# EAGLE board motor_driver_ver3.0 (EAGLE 6.2)
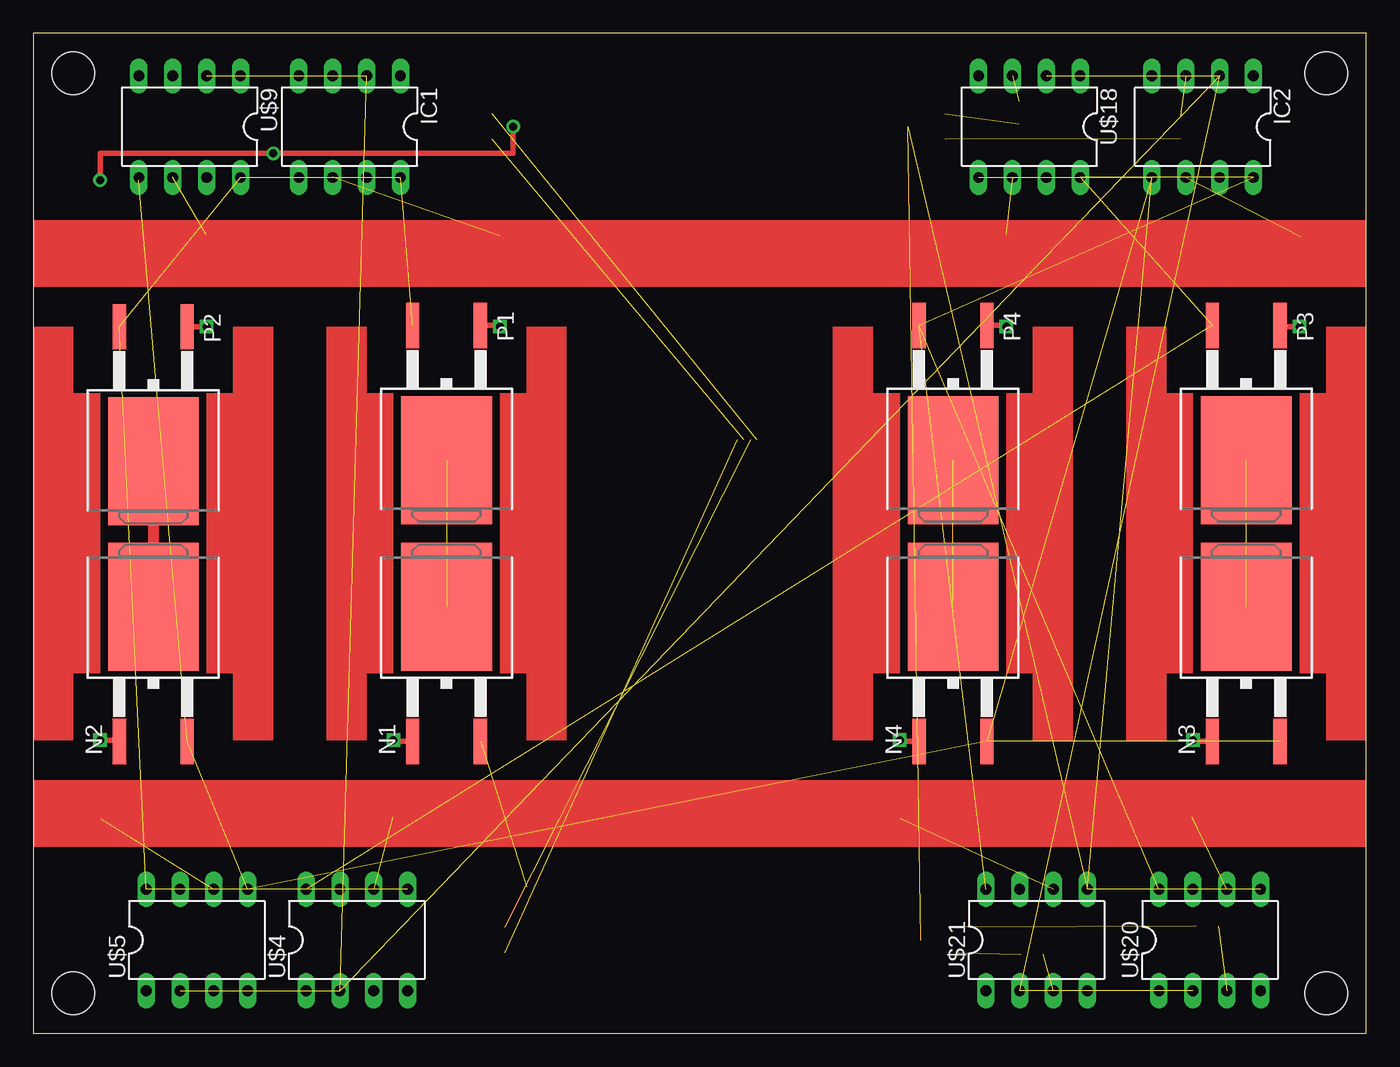
[diagram p0: board, top side]
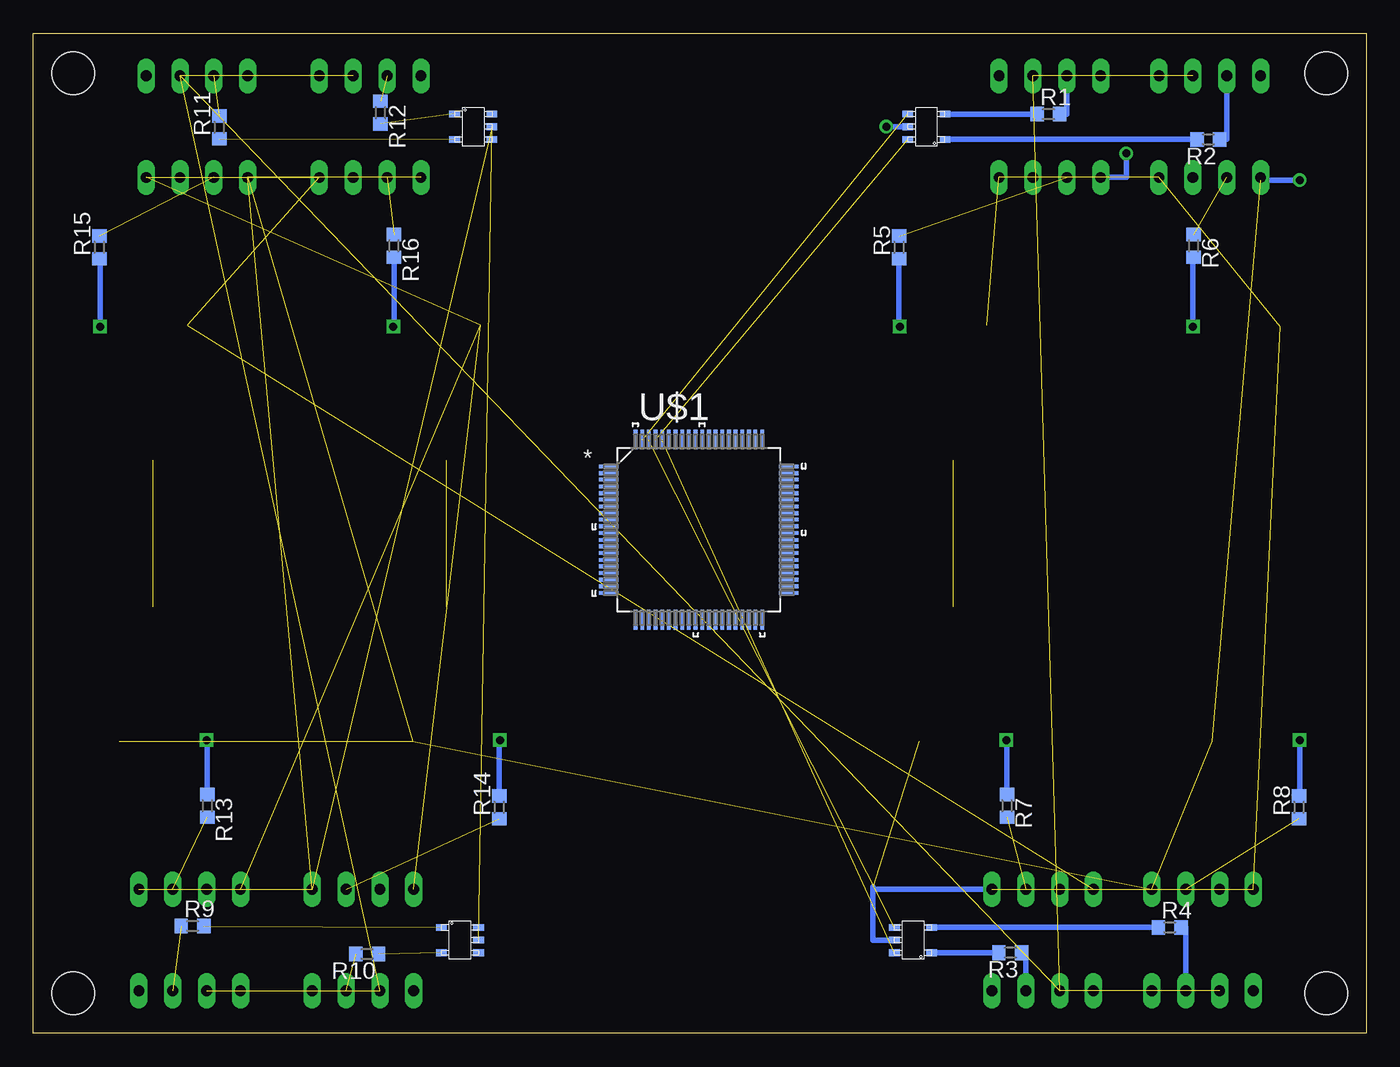
[diagram p1: board, bottom side, seen from below]

Size 100 x 75 mm. Coordinates in mm from the lower left corner, seen from the top.
Outline: 0,0 100,0 100,75 0,75 0,0
Copper layers (1*16): Top 0.035mm / dielectric 1.5mm / Bottom 0.035mm
Design rules: minimum track width 10mil, minimum drill 24mil, track to track 8mil, track to pad 8mil, pad to pad 8mil, via to via 8mil, smd to smd 8mil, copper to edge 40mil, drill to drill 8mil, minimum pad ring 10mil, minimum via ring 8mil, stop-mask expansion 4mil, vias tented up to drill 0mil, thermal gap 10mil
Holes 3.2 mm at 3,3 97,72 3,72 97,3

## Footprints (pad centres in the part's own frame; a part is rotated, then mirrored left to right if it is on the bottom)
DIL08 = drill 0.813 long: 1 -2.54,-3.81; 2 0,-3.81; 3 2.54,-3.81; 4 5.08,-3.81; 5 5.08,3.81; 6 2.54,3.81; 7 0,3.81; 8 -2.54,3.81
TO-263 = smd 1 x 3.4: 1 -2.54,-6.6; 2 2.54,-6.6 | smd 6.8 x 9.6: 3 0,3.5
1608 = smd 1 x 1.1: 1 -0.91,0.05; 2 0.79,0.05
QFP50P1400X1400X120-80N = smd 1.473 x 0.279: 1 -6.756,4.75; 2 -6.756,4.242; 3 -6.756,3.759; 4 -6.756,3.251; 5 -6.756,2.743; 6 -6.756,2.261; 7 -6.756,1.753; 8 -6.756,1.245; 9 -6.756,0.762; 10 -6.756,0.254; 11 -6.756,-0.254; 12 -6.756,-0.762; 13 -6.756,-1.245; 14 -6.756,-1.753; 15 -6.756,-2.261; 16 -6.756,-2.743; 17 -6.756,-3.251; 18 -6.756,-3.759; 19 -6.756,-4.242; 20 -6.756,-4.75; 41 6.756,-4.75; 42 6.756,-4.242; 43 6.756,-3.759; 44 6.756,-3.251; 45 6.756,-2.743; 46 6.756,-2.261; 47 6.756,-1.753; 48 6.756,-1.245; 49 6.756,-0.762; 50 6.756,-0.254; 51 6.756,0.254; 52 6.756,0.762; 53 6.756,1.245; 54 6.756,1.753; 55 6.756,2.261; 56 6.756,2.743; 57 6.756,3.251; 58 6.756,3.759; 59 6.756,4.242; 60 6.756,4.75 | smd 0.279 x 1.473: 21 -4.75,-6.756; 22 -4.242,-6.756; 23 -3.759,-6.756; 24 -3.251,-6.756; 25 -2.743,-6.756; 26 -2.261,-6.756; 27 -1.753,-6.756; 28 -1.245,-6.756; 29 -0.762,-6.756; 30 -0.254,-6.756; 31 0.254,-6.756; 32 0.762,-6.756; 33 1.245,-6.756; 34 1.753,-6.756; 35 2.261,-6.756; 36 2.743,-6.756; 37 3.251,-6.756; 38 3.759,-6.756; 39 4.242,-6.756; 40 4.75,-6.756; 61 4.75,6.756; 62 4.242,6.756; 63 3.759,6.756; 64 3.251,6.756; 65 2.743,6.756; 66 2.261,6.756; 67 1.753,6.756; 68 1.245,6.756; 69 0.762,6.756; 70 0.254,6.756; 71 -0.254,6.756; 72 -0.762,6.756; 73 -1.245,6.756; 74 -1.753,6.756; 75 -2.261,6.756; 76 -2.743,6.756; 77 -3.251,6.756; 78 -3.759,6.756; 79 -4.242,6.756; 80 -4.75,6.756
CHP-5 = smd 0.5 x 0.8: 1 -0.95,-1.4; 2 0.95,-1.4; 3 -0.95,1.4; 4 0,1.4; 5 0.95,1.4

## Placement (x,y rotation side)
IC1  TLP351  [DIL08]  25,68 180 top
IC2  TLP351  [DIL08]  89,68 180 top
N1  FDB8441  [TO-263]  31,28.5 0 top
N2  FDB8441  [TO-263]  9,28.5 0 top
N3  FDB8441  [TO-263]  91,28.5 0 top
N4  FDB8441  [TO-263]  69,28.5 0 top
P1  SUM110P06  [TO-263]  31,46.5 180 top
P2  SUM110P06  [TO-263]  9,46.4 180 top
P3  SUM110P06  [TO-263]  91,46.5 180 top
P4  SUM110P06  [TO-263]  69,46.5 180 top
R1  RESISTOR__SMD  [1608]  23.78,68.89 0 bottom
R2  RESISTOR__SMD  [1608]  11.9,67.1 180 bottom
R3  RESISTOR__SMD  [1608]  26.77,6.1 180 bottom
R4  RESISTOR__SMD  [1608]  14.68,7.9 0 bottom
R5  RESISTOR__SMD  [1608]  35,59 90 bottom
R6  RESISTOR__SMD  [1608]  13,59 270 bottom
R7  RESISTOR__SMD  [1608]  27,17 270 bottom
R8  RESISTOR__SMD  [1608]  5,17 90 bottom
R9  RESISTOR__SMD  [1608]  88,8 0 bottom
R10  RESISTOR__SMD  [1608]  75,6 180 bottom
R11  RESISTOR__SMD  [1608]  86,68 90 bottom
R12  RESISTOR__SMD  [1608]  74,69 270 bottom
R13  RESISTOR__SMD  [1608]  87,17 270 bottom
R14  RESISTOR__SMD  [1608]  65,17 90 bottom
R15  RESISTOR__SMD  [1608]  95,59 90 bottom
R16  RESISTOR__SMD  [1608]  73,59 270 bottom
U$1  DSPIC33FJ64MC508IP  [QFP50P1400X1400X120-80N]  50.07,37.77 0 bottom
U$4  TLP351  [DIL08]  23,7 0 top
U$5  TLP351  [DIL08]  11,7 0 top
U$8  CPH5617  [CHP-5]  68,7 270 bottom
U$9  TLP351  [DIL08]  13,68 180 top
U$14  CPH5617  [CHP-5]  34,7 90 bottom
U$15  CPH5617  [CHP-5]  67,68 270 bottom
U$18  TLP351  [DIL08]  76,68 180 top
U$19  CPH5617  [CHP-5]  33,68 90 bottom
U$20  TLP351  [DIL08]  87,7 0 top
U$21  TLP351  [DIL08]  74,7 0 top

## Library data of the parts
IC1 IC2 U$4 U$5 U$9 U$18 U$20 U$21 = 04_IC
N1-N4 P1-P4 U$8 U$14 U$15 U$19 = 06_FET
R1-R16 = 01_R
U$1 = 07_PIC

## Nets
+5V: IC1.2 IC2.2 U$4.2 U$5.2 U$9.2 U$18.2 U$20.2 U$21.2
+16.8V: IC1.8 IC2.8 P1.2 P2.2 P3.2 P4.2 U$4.8 U$5.8 U$9.8 U$18.8 U$20.8 U$21.8
AVDD: U$1.25
AVSS: U$1.26
GND: IC1.5 IC2.5 N1.2 N2.2 N3.2 N4.2 U$4.5 U$5.5 U$8.4 U$9.5 U$14.4 U$15.4 U$18.5 U$19.4 U$20.5 U$21.5
N$1: R4.1 U$14.2
N$2: R3.2 U$14.1
N$3: R3.1 U$4.3
N$4: R4.2 U$5.3
N$5: U$1.76 U$14.3
N$6: U$1.78 U$14.5
N$7: R1.1 U$19.2
N$8: R2.2 U$19.1
N$9: N1.1 R7.1
N$10: N2.1 R8.2
N$11: R7.2 U$4.6
N$12: N1.3 P1.3
N$13: N2.3 P2.3
N$14: R8.1 U$5.6
N$15: P1.1 R5.1
N$16: IC1.6 R5.2
N$17: IC1.3 R1.2
N$18: R2.1 U$9.3
N$19: U$1.79 U$19.5
N$20: U$1.77 U$19.3
N$21: P2.1 R6.2
N$22: R6.1 U$9.6
N$23: N3.3 P3.3
N$24: N4.3 P4.3
N$25: R9.1 U$20.3
N$26: R10.2 U$21.3
N$27: U$8.3
N$29: IC2.3 R11.2
N$30: R12.1 U$18.3
N$31: U$15.5
N$32: U$15.3
N$33: R10.1 U$8.2
N$34: R9.2 U$8.1
N$35: R11.1 U$15.2
N$36: R12.2 U$15.1
N$37: N3.1 R13.1
N$38: R13.2 U$20.6
N$39: N4.1 R14.2
N$40: R14.1 U$21.6
N$41: P3.1 R15.1
N$42: IC2.6 R15.2
N$43: P4.1 R16.2
N$44: R16.1 U$18.6
VCAP/VDDCORE: U$1.70
VDD: U$1.12
VDD_2: U$1.32
VDD_3: U$1.48
VDD_4: U$1.71
VSS: U$1.11
VSS_2: U$1.31
VSS_3: U$1.51

## Tracks (layer width: path | path; a pad name or v marks a point on that pad's centre or on a via)
+5V  (7 unrouted)
+16.8V  (11 unrouted)
GND  (via drill 0.6)  (12 unrouted)
  Top 0.406: v5,64 5,66 v18,66 36,66 v36,68
  Bottom 0.406: U$14.4 37,7 37,10.81 | 37,11 37,10.81 | 37,10.81 U$4.5 | U$9.5 7.92,64 v5,64 | v18,66 18,64.19 IC1.5 | U$19.4 v36,68
N$1
  Bottom 0.406: U$14.2 R4.1 | R4.1
N$2
  Bottom 0.406: R3.2 U$14.1 | U$14.1
N$3
  Bottom 0.406: R3.1 25.54,6.05 U$4.3
N$4
  Bottom 0.406: R4.2 13.54,7.95 U$5.3
N$5  (1 unrouted)
N$6  (1 unrouted)
N$7
  Bottom 0.406: R1.1 U$19.2
N$8
  Bottom 0.406: U$19.1 R2.2
N$9  (via drill 0.6)
  Top 0.406: N1.1 27,21.9 v27,22
  Bottom 0.406: v27,22 26.95,22 R7.1
N$10  (via drill 0.6)
  Top 0.406: v5,22 6.46,22 N2.1
  Bottom 0.406: R8.2 5,17.79 v5,22
N$11  (1 unrouted)
N$12  (1 unrouted)
N$13
  Top 0.813: P2.3 N2.3
N$14  (1 unrouted)
N$15  (via drill 0.6)
  Top 0.406: P1.1 35,53.1 v35,53
  Bottom 0.406: v35,53 35.05,53 R5.1
N$16  (1 unrouted)
N$17
  Bottom 0.406: R1.2 22.46,68.94 IC1.3
N$18
  Bottom 0.406: R2.1 10.46,67.05 U$9.3
N$19  (1 unrouted)
N$20  (1 unrouted)
N$21  (via drill 0.6)
  Top 0.406: v13,53 P2.1
  Bottom 0.406: R6.2 13,58.21 v13,53
N$22  (1 unrouted)
N$23  (1 unrouted)
N$24  (1 unrouted)
N$25  (1 unrouted)
N$26  (1 unrouted)
N$29  (1 unrouted)
N$30  (1 unrouted)
N$33  (1 unrouted)
N$34  (1 unrouted)
N$35  (1 unrouted)
N$36  (1 unrouted)
N$37  (via drill 0.6)
  Top 0.406: N3.1 87,21.9 v87,22
  Bottom 0.406: v87,22 86.95,22 R13.1
N$38  (1 unrouted)
N$39  (via drill 0.6)
  Top 0.406: N4.1 65,21.9 v65,22
  Bottom 0.406: v65,22 65.05,22 R14.2
N$40  (1 unrouted)
N$41  (via drill 0.6)
  Top 0.406: v95,53 93.54,53 P3.1
  Bottom 0.406: R15.1 95,58.09 v95,53
N$42  (1 unrouted)
N$43  (via drill 0.6)
  Top 0.406: P4.1 73,53.1 v73,53
  Bottom 0.406: v73,53 72.95,53 R16.2
N$44  (1 unrouted)
(copper drawn outside any net)
  shapes: Top area x18